# Altium PCB PCB1.PcbDoc
Units mm, origin at the board's own origin, x right, y up, seen from the top; angles counter-clockwise.
Board outline 55.5 x 74.04 mm, 2 copper layers (Top Layer, Bottom Layer); 29 components, 50 nets, 134 pads, 10 vias.
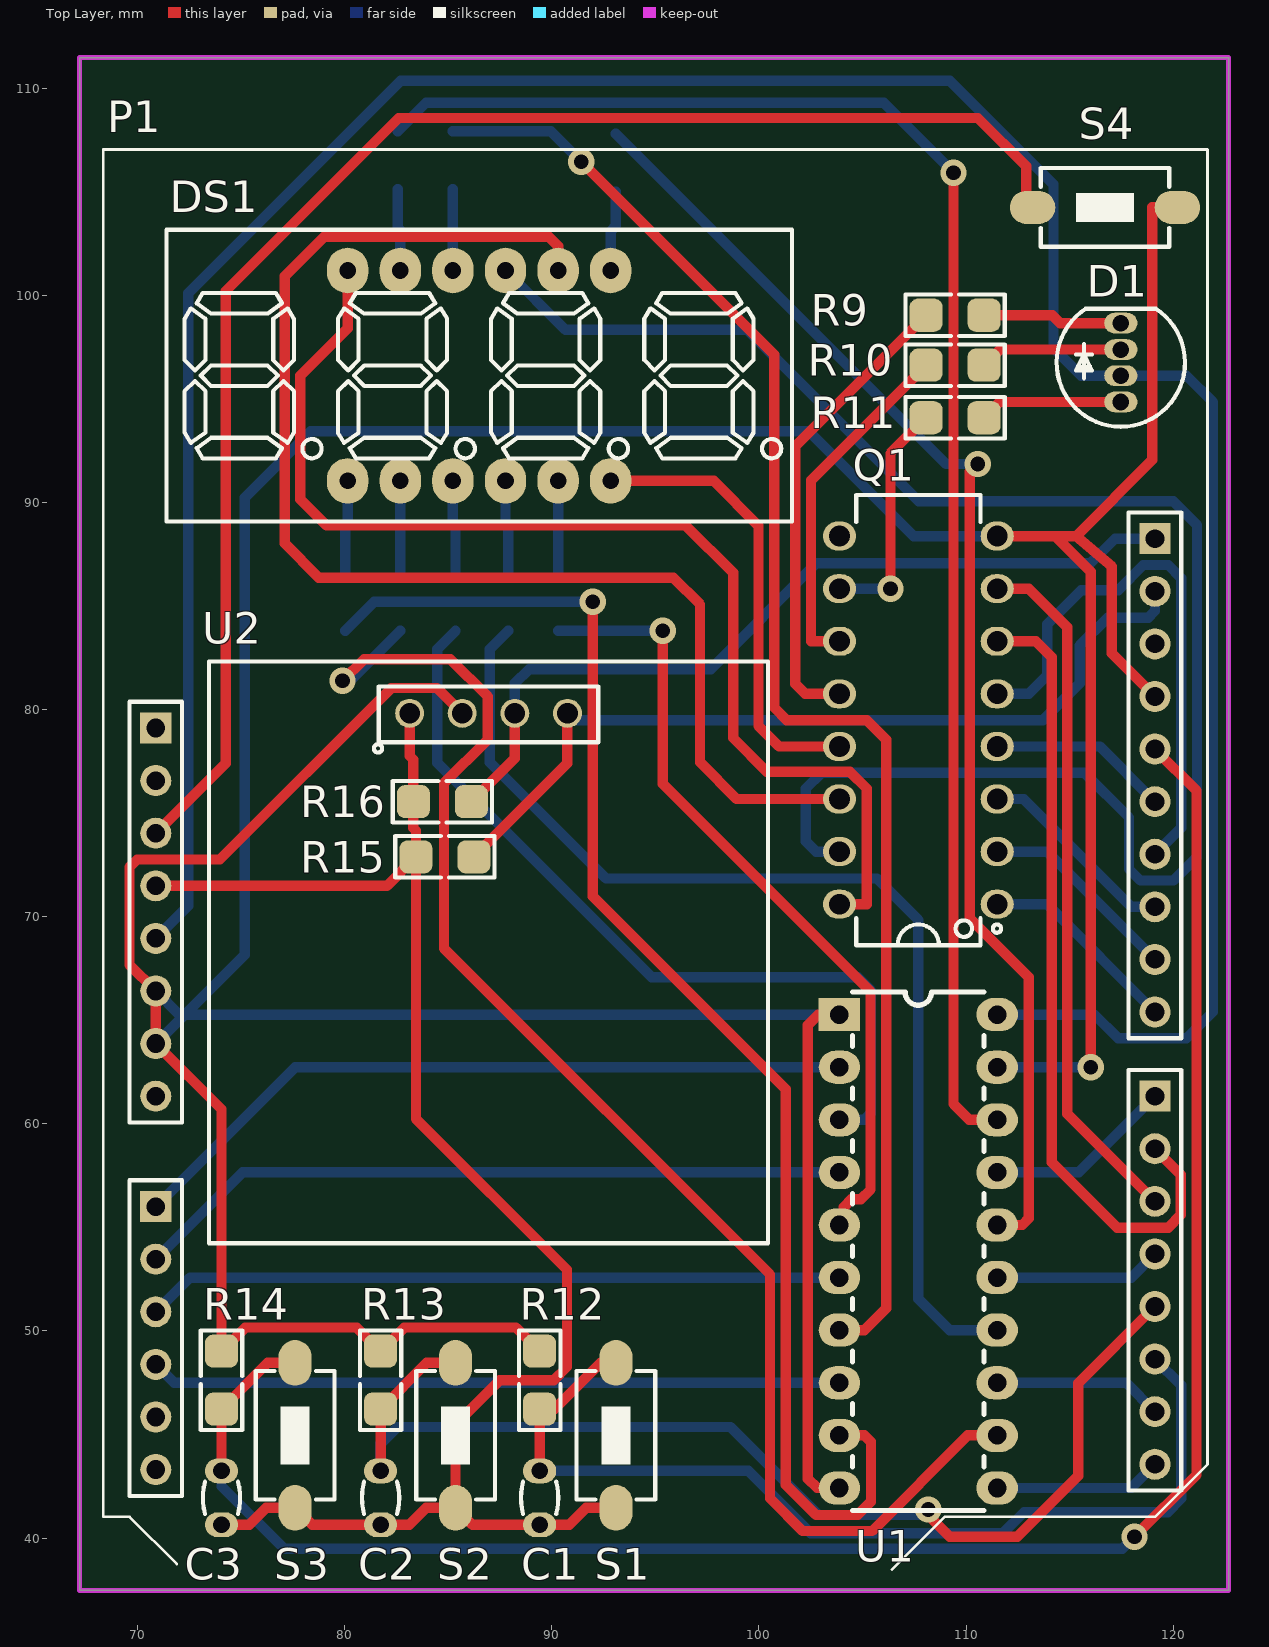
[diagram p0: Top Layer view]
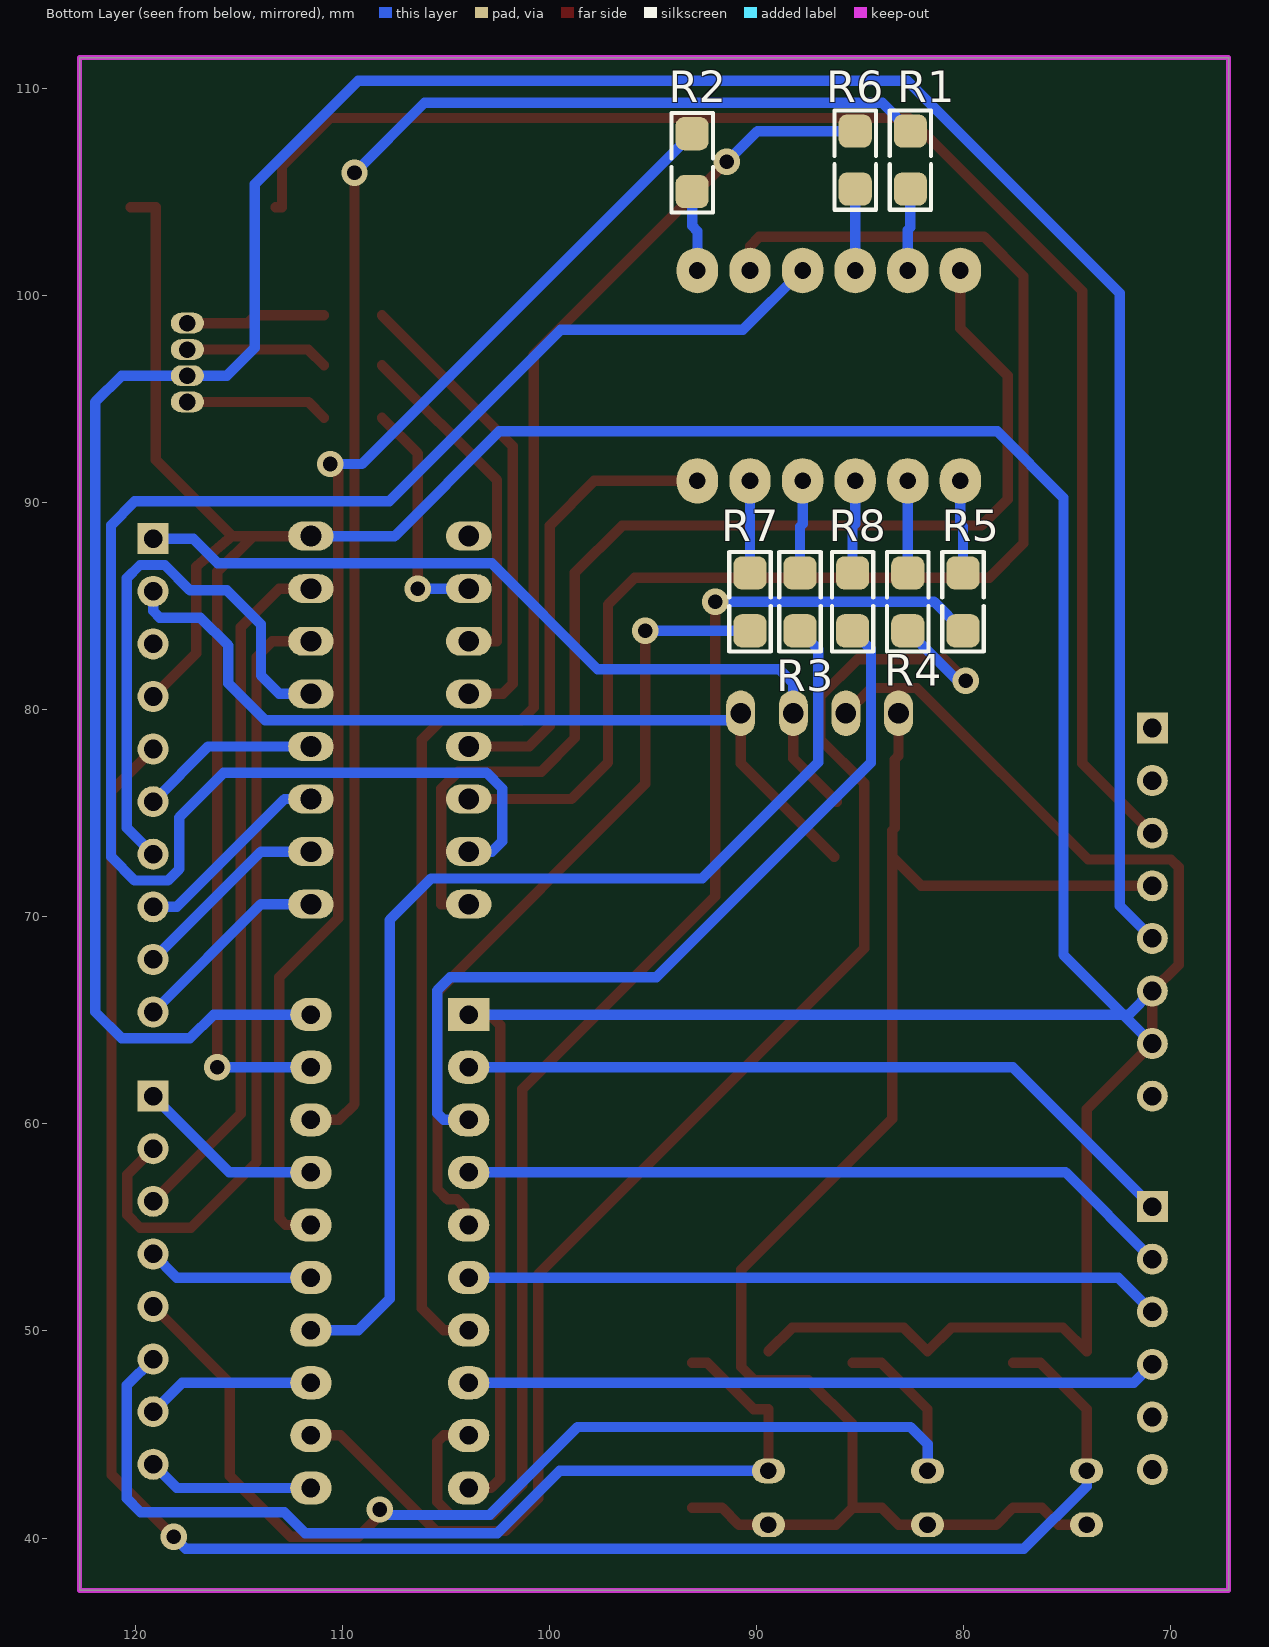
[diagram p1: Bottom Layer view, seen from below]

## Layer stack, top to bottom
Top Solder: solder mask 0.0102, Solder Resist, Dk 3.5
Top Layer: signal copper 0.0356
Dielectric 1: dielectric 0.32, FR-4, Dk 4.8
Bottom Layer: signal copper 0.0356
Bottom Solder: solder mask 0.0102, Solder Resist, Dk 3.5

## Board outline
67.183,37.465 122.682,37.465 122.682,111.506 67.183,111.506

## Design rules (kind name [scope] priority, off if disabled: settings)
Clearance [All] p1: gap=0.254 ignorepadtopadclearanceinfootprint=FALSE except(0: Arc-Hole Track-Hole SMDPad-Hole THPad-Hole Via-Hole Fill-Hole Poly-Hole Region-Hole Text-Hole)
PolygonConnect [All] p1: connectstyle=Relief reliefconductorwidth=0.254 reliefentries=4 polygonreliefangle="90 Angle" airgapwidth=0.254
RoutingVias [All] p1: holewidth=0.711 width=1.27 viastyle="Through Hole" minholewidth=0.711 minwidth=1.27 maxholewidth=0.711 maxwidth=1.27
SolderMaskExpansion [All] p1: expansion=0.102 istentingtop=FALSE
Width [All] p1: maxlimit=1 minlimit=0.3 preferedwidth=0.5
30 further rules are at their usual default settings.

## Components (designator, comment, footprint, x,y, rotation, side; value= is the part's Value field where it differs from the comment)
C1 "100nF" C_CER_D3 89.408,41.94 r90 top
C2 "100nF" C_CER_D3 81.724,41.94 r90 top
C3 "100nF" C_CER_D3 74.041,41.94 r90 top
D1 "LED_RGB" LED5RGB 117.475,96.774 r90 top
DS1 "4Digit, Red" 7Seg-MPX4-30.2x14.1mm 86.487,96.139 r0 top
P1 "UNO" Arduino_uno_S_3 94.615,70.485 r0 top locked
Q1 "ULN2003" DIP_16 107.696,79.502 r180 top
R1 "470" R1206 82.55,106.553 r270 bottom
R2 "470" R1206 93.091,106.426 r270 bottom
R3 "470" R1206 87.884,85.217 r90 bottom
R4 "470" R1206 82.677,85.217 r90 bottom
R5 "470" R1206 80.01,85.217 r90 bottom
R6 "470" R1206 85.217,106.553 r270 bottom
R7 "470" R1206 90.297,85.217 r90 bottom
R8 "470" R1206 85.344,85.217 r90 bottom
R9 "470" R1206 109.474,99.06 r0 top
R10 "470" R1206 109.474,96.647 r0 top
R11 "470" R1206 109.474,94.107 r0 top
R12 "4.7K" R1206 89.408,47.625 r270 top
R13 "4.7K" R1206 81.724,47.625 r270 top
R14 "4.7K" R1206 74.041,47.625 r270 top
R15 "4.7K" R1206 84.833,72.898 r180 top
R16 "4.7K" R1206 84.709,75.565 r180 top
S1 "PB" SW_PB_SMD_2PIN_SPST_6X3X2 93.091,44.958 r90 top
S2 "PB" SW_PB_SMD_2PIN_SPST_6X3X2 85.344,44.958 r90 top
S3 "PB" SW_PB_SMD_2PIN_SPST_6X3X2 77.597,44.958 r90 top
S4 "PB" SW_PB_SMD_2PIN_SPST_6X3X2 116.713,104.267 r180 top
U1 "74HCT244" PDIP20 107.696,53.848 r0 top
U2 "OLED_SSD1306" OLED_SSD1306_64_I2C 86.938,79.834 r0 top

## Footprints (in the part's own frame and the unit in brackets; to place one, negate y for a bottom-side part, rotate by r counter-clockwise, add the part's x,y. Pads: shape width x height; smd on the part's side, far side on the other; paste and mask are expansions set on the pad)
7Seg-MPX4-30.2x14.1mm [mm] "Display, 12-Leads, Body 30/2x14/1mm"
  oval 2x2.2 hole 0.8: 1(-6.35,-5.08) 2(-3.81,-5.08) 3(-1.27,-5.08) 4(1.27,-5.08) 5(3.81,-5.08) 6(6.35,-5.08) 7(6.35,5.08) 8(3.81,5.08) 9(1.27,5.08) 10(-1.27,5.08) 11(-3.81,5.08) 12(-6.35,5.08)
  silkscreen extent -15.1,-7.05 15.1,7.05, body extent -15,-7 15,7, height 7.1
Arduino_uno_S_3 [mm]
  rect 1.5x1.5 hole 0.9: 1(-23.749,8.636) 9(-23.749,-14.478) 22(24.511,-9.144) 32(24.511,17.78)
  round 1.5 hole 0.9: 2(-23.749,6.096) 3(-23.749,3.556) 4(-23.749,1.016) 5(-23.749,-1.524) 6(-23.749,-4.064) 7(-23.749,-6.604) 8(-23.749,-9.144) 10(-23.749,-17.018) 11(-23.749,-19.558) 12(-23.749,-22.098) 13(-23.749,-24.638) 14(-23.749,-27.178) 15(24.511,-26.924) 16(24.511,-24.384) 17(24.511,-21.844) 18(24.511,-19.304) 19(24.511,-16.764) 20(24.511,-14.224) 21(24.511,-11.684) 23(24.511,-5.08) 24(24.511,-2.54) 25(24.511,0) 26(24.511,2.54) 27(24.511,5.08) 28(24.511,7.62) 29(24.511,10.16) 30(24.511,12.7) 31(24.511,15.24)
  silkscreen extent -26.29,-32 27.05,36.58, body extent -25.02,-28.31 25.78,19.05, height 8.51
C_CER_D3 [mm] "CAP, CER MULTILAYER, D:3.5mm, pitch: 2.54mm"
  oval 1.2x1.6 hole 0.8: 1(-1.3,0) 2(1.3,0)
  silkscreen extent -0.78,-0.9 0.78,0.9, body extent -1.75,-0.75 1.75,0.75, height 4
DIP_16 [mm] "DIP, pitch 2.54mm, 300mil Width"
  oval 1.6x1.4 / inner round 1.4 / far side oval 2.2x1.4 hole 1: 1(-3.81,8.89) 2(-3.81,6.35) 3(-3.81,3.81) 4(-3.81,1.27) 5(-3.81,-1.27) 6(-3.81,-3.81) 7(-3.81,-6.35) 8(-3.81,-8.89) 9(3.81,-8.89) 10(3.81,-6.35) 11(3.81,-3.81) 12(3.81,-1.27) 13(3.81,1.27) 14(3.81,3.81) 15(3.81,6.35) 16(3.81,8.89)
  silkscreen extent -4,-10.87 3,10.87, body extent -3.93,-10 3.94,10, height 5.1
LED5RGB [mm] "LED THD 5MM RGB"
  oval 1x1.6 hole 0.8 mask+0.1: 1(-1.905,0) 2(-0.635,0) 3(0.627,0) 4(1.905,0)
  silkscreen extent -3.1,-3.1 2.6,3.1, body extent -2.83,-2.95 2.63,2.95, height 9.6
OLED_SSD1306_64_I2C [mm] "OLED SS1306 Breakout, 128X64, I2C"
  round 1.4 / inner round 1.4 / far side oval 1.4x2.2 hole 1 mask+0.1: 1(-3.81,0) 2(-1.27,0) 3(1.27,0) 4(3.81,0)
  silkscreen extent -13.5,-25.6 13.5,2.5, body extent -13.35,-25.5 13.35,2.36, height 13.97
PDIP20 [mm] "20-Pin Plastic DIP (DD20) NARROW_(300mil width) - 100mil pitch"
  rect 2x1.6 hole 0.9: 1(-3.81,11.43)
  oval 2x1.6 hole 0.9: 2(-3.81,8.89) 3(-3.81,6.35) 4(-3.81,3.81) 5(-3.81,1.27) 6(-3.81,-1.27) 7(-3.81,-3.81) 8(-3.81,-6.35) 9(-3.81,-8.89) 10(-3.81,-11.43) 11(3.81,-11.43) 12(3.81,-8.89) 13(3.81,-6.35) 14(3.81,-3.81) 15(3.81,-1.27) 16(3.81,1.27) 17(3.81,3.81) 18(3.81,6.35) 19(3.81,8.89) 20(3.81,11.43)
  silkscreen extent -3.17,-12.52 3.17,12.52, body extent -3.94,-12.51 3.94,12.51, height 3.76
R1206 [mm] "CHIP RESISTOR 1/4 WATT, Body 3.2x1.6mm,1206, 3216"
  rrect50% 1.6x1.6 smd mask+0.075: 1(-1.4,0) 2(1.4,0)
  Top Layer pour cut-out: -0.8,1 -0.8,-1 0.8,-1 0.8,1
  silkscreen extent -2.4,-1 2.4,1, body extent -1.68,-0.86 1.68,0.86, height 0.85
SW_PB_SMD_2PIN_SPST_6X3X2 [mm] "SWITCH, PUSHBUTTON, SMD, SPST, 6X3.5X2.5mm, RS-282G05A3, SKQYPA, 50000 Cycles"
  oval 2.2x1.6 smd mask+0.1: 1(-3.5,0) 2(3.5,0)
  silkscreen extent -3.1,-1.9 3.1,1.9, body extent -3.4,-1.86 3.4,1.86, height 2.5

## Part data
C1 C2 C3: library part CAP_THD_CERML, "CAP, THD, CER MULTI LAYER,", ASSEMBLY=ASSEMBLY, DESC="CAP, CER MULTI LAYER,", MANF=MANF, MANF_P#=MANF_PART#, PARAM=50V, PARAM2=PARAM2, PRICE="100= 1$"
D1: library part LED_THD_5MM_RGB_CA, "LED, THD, 5MM, RGB COMMON CATHODE", ASSEMBLY=ASSEMBLY, DESC=DESCRIPTION, MANF="CHINA YOUNG", MANF_P#=YSL-R596CR3G4B5C-C10, PRICE=PRICE
DS1: library part ModSen_7Seg_MPX4_CC, "7Segment-MPX4-CC", Package=Package?, Rating=Rating?, Inflow=8128, Type=Type?
P1: library part Con_Arduino_UNO_S, "Arduino uno slave", Package=Package?, Rating=Rating?, Inflow=inflow?, Type=Type?
Q1: library part ULN2003_DIP16, "Darlington, 7-CH, 50V, 0.5A", MANF=DIODES, MANF_P#=ULN2003A, PARAM="7-CH, 50V, 0.5A", PARAM2=-
R1 R2 R3 R4 R5 R6 R7 R8 R9 R10 R11 R12 R13 R14 R15 R16: library part RES_SMD_1206, "RESISTOR, SMD", ASSEMBLY=ASSEMBLY, DESC=DESCRIPTION, DIST#=MOUSER, MANF=-, MANF_P#=-, PARAM=-W, PARAM2=1%, PRICE="100= 0.5$"
S1 S2 S3 S4: library part SW_PushButton_2_SMD, "SMT Tactile ‎Switch", Package=SMD, Rating=2b, Inflow=8260, Type=Vertical
U1: library part IC_Logic_74HCT244, "Octal Bus Buffer with 3 State Outputs (Non Inverted)", Package=Dip, Rating=8b, Inflow=1118, Type="3-State Non-Inverting"
U2: library part OLED_SSD1306_64_I2C, "OLED, SSD1306, 0.96\", 128X64, BREAKOUT I2C", MANF=-, MANF_P#=OLED_SSD1306_I2C, PARAM="2 Colors, 0.96\", 128X64", PARAM2="3.3/5VCC, -20~70oC"

## Via types
v1: diameter 1.27, hole 0.711, Top Layer to Bottom Layer, 10 vias

## Nets (pads, with @x,y where several pads share a name; then routed paths per layer and width w, separated by ;. In a path a pad name is that pad's centre, name@x,y a point inside that pad or via, vN(x,y) a via of type N, cw(c..) or ccw(c..) an arc to the next point about the centre after c; other vN are vias at no path point)
+3.3: C1.1 C2.1 C3.1 P1.4 R15.2 R16.2 S1.1 S2.1 S3.1 U2.1 | length 79.2
  Top Layer w0.5: P1.4 82.036,71.501 R15.2 ; C3.1 75.387,40.64 76.205,41.458 S3.1 78.415,40.64 C2.1 83.109,40.64 83.927,41.458 S2.1 ; U2.1 83.128,77.778 83.309,77.597 R16.2 83.309,74.292 83.433,74.168 R15.2 ; S1.1 91.648,41.458 90.83,40.64 C1.1 86.162,40.64 S2.1 ; R15.2 83.433,60.255 90.729,52.959 90.729,48.26 90.094,47.625 87.478,47.625 85.344,45.491 S2.1
+5: D1.2 P1.5 U1.20 | length 137.5
  Bottom Layer w0.5: P1.5 72.441,70.536 72.441,100.127 82.702,110.388 109.22,110.388 114.224,105.385 114.224,97.485 115.57,96.139 D1.2 120.65,96.139 121.92,94.869 121.92,65.405 120.65,64.135 117.348,64.135 116.205,65.278 U1.20
Digit1: P1.23 Q1.1 | length 9.8
  Bottom Layer w0.5: Q1.1 113.919,70.612 P1.23
Digit2: P1.24 Q1.2 | length 9.8
  Bottom Layer w0.5: Q1.2 113.919,73.152 P1.24
Digit3: P1.25 Q1.3 | length 9.8
  Bottom Layer w0.5: Q1.3 112.784,75.692 117.991,70.485 P1.25
Digit4: P1.27 Q1.4 | length 8.7
  Bottom Layer w0.5: Q1.4 116.459,78.232 P1.27
GND: P1.6 P1.7 P1.29 Q1.8 R12.1 R13.1 R14.1 S4.1 U1.1 U1.10 U1.19 U2.2 | length 252.1
  Top Layer w0.5: U2.2 84.451,81.051 82.245,81.051 73.965,72.771 69.977,72.771 69.596,72.39 69.596,67.691 P1.6 P1.7 74.041,60.706 R14.1 75.181,50.165 80.584,50.165 R13.1 82.865,50.165 88.268,50.165 R12.1 ; U1.10 102.806,42.418 102.362,42.862 102.362,64.77 102.87,65.278 U1.1 ; Q1.8 114.3,88.392 ; v1(116.027,62.738) 116.027,86.665 114.3,88.392 ; P1.29 117.043,82.728 117.043,86.919 115.316,88.392 ; S4.1 118.999,104.267 118.999,92.075 115.316,88.392 ; 114.3,88.392 115.316,88.392
  Bottom Layer w0.5: P1.7 72.263,65.278 ; P1.6 72.009,65.278 72.263,65.278 ; U1.1 72.263,65.278 ; U1.19 v1(116.027,62.738) ; Q1.8 107.467,88.392 102.413,93.447 78.359,93.447 75.159,90.246 75.159,68.174 72.263,65.278
NetD1_1: D1.1 R11.2 | length 6.9
  Top Layer w0.5: R11.2 111.636,94.869 D1.1
NetD1_3: D1.3 R10.2 | length 6.9
  Top Layer w0.5: R10.2 111.628,97.401 D1.3
NetD1_4: D1.4 R9.2 | length 6.8
  Top Layer w0.5: R9.2 114.173,99.06 114.554,98.679 D1.4
NetDS1_1: DS1.1 R5.2 | length 4.5
  Bottom Layer w0.5: R5.2 80.01,88.849 80.137,88.976 DS1.1
NetDS1_2: DS1.2 R4.2 | length 4.4
  Bottom Layer w0.5: R4.2 DS1.2
NetDS1_3: DS1.3 R8.2 | length 4.5
  Bottom Layer w0.5: DS1.3 85.217,88.976 85.344,88.849 R8.2
NetDS1_4: DS1.4 R3.2 | length 4.5
  Bottom Layer w0.5: DS1.4 87.757,88.976 87.884,88.849 R3.2
NetDS1_5: DS1.5 R7.2 | length 4.4
  Bottom Layer w0.5: R7.2 DS1.5
NetDS1_6: DS1.6 Q1.13 | length 22
  Top Layer w0.5: DS1.6 97.815,91.059 99.974,88.9 99.974,79.223 100.965,78.232 Q1.13
NetDS1_7: DS1.7 R2.2 | length 3.9
  Bottom Layer w0.5: DS1.7 92.837,103.124 93.091,103.378 R2.2
NetDS1_8: DS1.8 Q1.14 | length 64.6
  Top Layer w0.5: DS1.8 90.297,102.4 89.852,102.845 78.994,102.845 77.089,100.94 77.089,88.036 78.74,86.385 95.86,86.385 97.155,85.09 97.155,77.47 98.933,75.692 Q1.14
NetDS1_9: DS1.9 Q1.15 | length 82.2
  Bottom Layer w0.5: DS1.9 87.782,101.219 90.653,98.349 99.441,98.349 107.721,90.068 120.015,90.068 121.158,88.925 121.158,72.898 120.015,71.755 118.427,71.755 117.872,72.311 117.872,74.803 115.713,76.962 103.022,76.962 102.26,76.2 102.26,73.66 102.768,73.152 Q1.15
NetDS1_10: DS1.10 R6.2 | length 3.9
  Bottom Layer w0.5: DS1.10 R6.2
NetDS1_11: DS1.11 R1.2 | length 4
  Bottom Layer w0.5: R1.2 82.55,103.302 82.677,103.175 DS1.11
NetDS1_12: DS1.12 Q1.16 | length 56.7
  Top Layer w0.5: DS1.12 80.137,98.425 77.851,96.139 77.851,90.17 79.121,88.9 96.469,88.9 98.755,86.614 98.755,78.638 100.381,77.013 104.394,77.013 105.207,76.2 105.207,70.612 Q1.16
NetQ1_10: Q1.10 R11.1 | length 11.4
  Top Layer w0.5: v1(106.35,85.852) 106.35,92.383 R11.1
  Bottom Layer w0.5: Q1.10 v1(106.35,85.852)
NetQ1_11: Q1.11 R10.1 | length 17
  Top Layer w0.5: Q1.11 102.514,83.312 102.514,91.087 R10.1
NetQ1_12: Q1.12 R9.1 | length 22.8
  Top Layer w0.5: Q1.12 102.235,80.772 101.752,81.255 101.752,92.738 R9.1
NetR1_1: R1.1 U1.18 | length 76.2
  Top Layer w0.5: v1(109.398,105.943) 109.398,60.96 110.16,60.198 U1.18
  Bottom Layer w0.5: R1.1 83.919,109.322 106.02,109.322 v1(109.398,105.943)
NetR2_1: R2.1 U1.16 | length 63.5
  Top Layer w0.5: v1(110.566,91.872) 110.185,91.491 110.185,69.926 113.03,67.081 113.03,55.435 112.712,55.118 U1.16
  Bottom Layer w0.5: R2.1 109.045,91.872 v1(110.566,91.872)
NetR3_1: R3.1 U1.14 | length 53.3
  Bottom Layer w0.5: R3.1 86.995,82.928 86.995,77.47 92.608,71.857 105.689,71.857 107.696,69.85 107.696,51.562 109.22,50.038 U1.14
NetR4_1: R4.1 U1.12 | length 71.7
  Top Layer w0.5: v1(79.883,81.407) 80.924,82.448 85.09,82.448 86.893,80.645 86.893,78.562 84.785,76.454 84.785,68.478 100.533,52.73 100.533,41.91 102.108,40.335 105.461,40.335 110.084,44.958 U1.12
  Bottom Layer w0.5: v1(79.883,81.407) 80.03,81.554 80.414,81.554 R4.1
NetR5_1: R5.1 U1.9 | length 68.6
  Top Layer w0.5: v1(91.973,85.217) 91.973,70.993 101.295,61.671 101.295,42.57 102.752,41.114 104.775,41.114 105.41,41.749 105.41,44.64 105.093,44.958 U1.9
  Bottom Layer w0.5: R5.1 81.41,85.217 v1(91.973,85.217)
NetR6_1: R6.1 U1.7 | length 73.3
  Top Layer w0.5: v1(91.415,106.477) 100.736,97.155 100.736,80.112 101.346,79.502 105.207,79.502 106.144,78.565 106.144,51.09 105.093,50.038 U1.7
  Bottom Layer w0.5: R6.1 89.938,107.953 v1(91.415,106.477)
NetR7_1: R7.1 U1.5 | length 38.9
  Top Layer w0.5: v1(95.355,83.817) 95.355,76.426 105.39,66.39 105.39,56.832 104.911,56.354 104.457,56.354 104.089,55.986 104.089,55.118 U1.5
  Bottom Layer w0.5: R7.1 v1(95.355,83.817)
NetR8_1: R8.1 U1.3 | length 39.8
  Bottom Layer w0.5: R8.1 84.455,82.928 84.455,77.445 94.818,67.081 104.775,67.081 105.41,66.446 105.41,60.515 105.093,60.198 U1.3
RESET: P1.3 S4.2 | length 73
  Top Layer w0.5: P1.3 74.244,77.419 74.244,100.228 82.601,108.585 110.566,108.585 112.903,106.248 112.903,104.267 S4.2
RGB_B: P1.26 Q1.5 | length 27
  Bottom Layer w0.5: Q1.5 113.03,80.772 113.919,81.661 113.919,84.125 115.57,85.776 117.348,85.776 118.567,86.995 119.761,86.995 120.396,86.36 120.396,74.295 P1.26
RGB_G: P1.21 Q1.6 | length 38.9
  Top Layer w0.5: Q1.6 113.372,83.312 114.134,82.55 114.134,58.154 117.298,54.991 119.761,54.991 120.38,55.61 120.38,57.547 P1.21
RGB_R: P1.20 Q1.7 | length 33.6
  Top Layer w0.5: Q1.7 113.03,85.852 114.888,83.994 114.888,60.499 P1.20
SCL: P1.32 R16.1 U2.3 | length 40.4
  Top Layer w0.5: R16.1 88.208,77.664 U2.3
  Bottom Layer w0.5: U2.3 88.208,81.28 88.894,81.966 97.663,81.966 102.768,87.071 116.002,87.071 117.196,88.265 P1.32
SDA: P1.31 R15.1 U2.4 | length 41.7
  Top Layer w0.5: R15.1 90.748,77.413 U2.4
  Bottom Layer w0.5: U2.4 90.748,79.502 113.716,79.502 115.494,81.28 115.494,83.109 116.84,84.455 118.808,84.455 119.126,84.772 P1.31
Seg1: P1.9 U1.2 | length 35.8
  Bottom Layer w0.5: P1.9 77.597,62.738 U1.2
Seg2: P1.10 U1.4 | length 34.8
  Bottom Layer w0.5: P1.10 75.057,57.658 U1.4
Seg3: P1.11 U1.6 | length 33.7
  Bottom Layer w0.5: P1.11 72.517,52.578 U1.6
Seg4: P1.12 U1.8 | length 33.4
  Bottom Layer w0.5: P1.12 71.755,47.498 U1.8
Seg5: P1.15 U1.11 | length 8.1
  Bottom Layer w0.5: U1.11 117.983,42.418 P1.15
Seg6: P1.16 U1.13 | length 8.2
  Bottom Layer w0.5: U1.13 117.729,47.498 P1.16
Seg7: P1.19 U1.15 | length 8.1
  Bottom Layer w0.5: U1.15 117.983,52.578 P1.19
Seg8: P1.22 U1.17 | length 9.1
  Bottom Layer w0.5: U1.17 115.443,57.658 P1.22
SW1: C1.2 P1.17 R12.2 S1.2 | length 47.8
  Top Layer w0.5: C1.2 R12.2 90.119,46.225 92.352,48.458 S1.2
  Bottom Layer w0.5: C1.2 99.485,43.24 102.496,40.229 111.781,40.229 112.801,41.25 119.736,41.25 120.396,41.91 120.396,47.371 P1.17
SW2: C2.2 P1.18 R13.2 S2.2 | length 56.4
  Top Layer w0.5: C2.2 R13.2 83.958,48.458 S2.2 ; v1(108.179,41.377) 108.179,41.097 109.22,40.056 112.471,40.056 115.418,43.002 115.418,47.473 P1.18
  Bottom Layer w0.5: C2.2 81.712,43.24 81.712,44.526 82.55,45.364 98.61,45.364 102.861,41.114 107.916,41.114 v1(108.179,41.377)
SW3: C3.2 P1.28 R14.2 S3.2 | length 93.9
  Top Layer w0.5: C3.2 R14.2 76.274,48.458 S3.2 ; v1(118.135,40.056) 121.134,43.054 121.134,76.097 P1.28
  Bottom Layer w0.5: C3.2 74.041,42.507 77.073,39.475 117.554,39.475 v1(118.135,40.056)
pads on no net: P1.1 P1.2 P1.8 P1.13 P1.14 P1.30 Q1.9

## Keep-outs
Keep-Out Layer:
  the board outline again, w0.254